# Altium PCB ECEN4730_SS_2021-11-10.PcbDoc
Units mil, origin at the board's own origin, x right, y up, seen from the top; angles counter-clockwise.
Board outline 2500 x 2100 mil, 4 copper layers (Top Layer, Int1 (GND), Int2 (GND), Bottom Layer), stack 53.912 mil thick; 37 components, 21 nets, 130 pads, 32 vias.
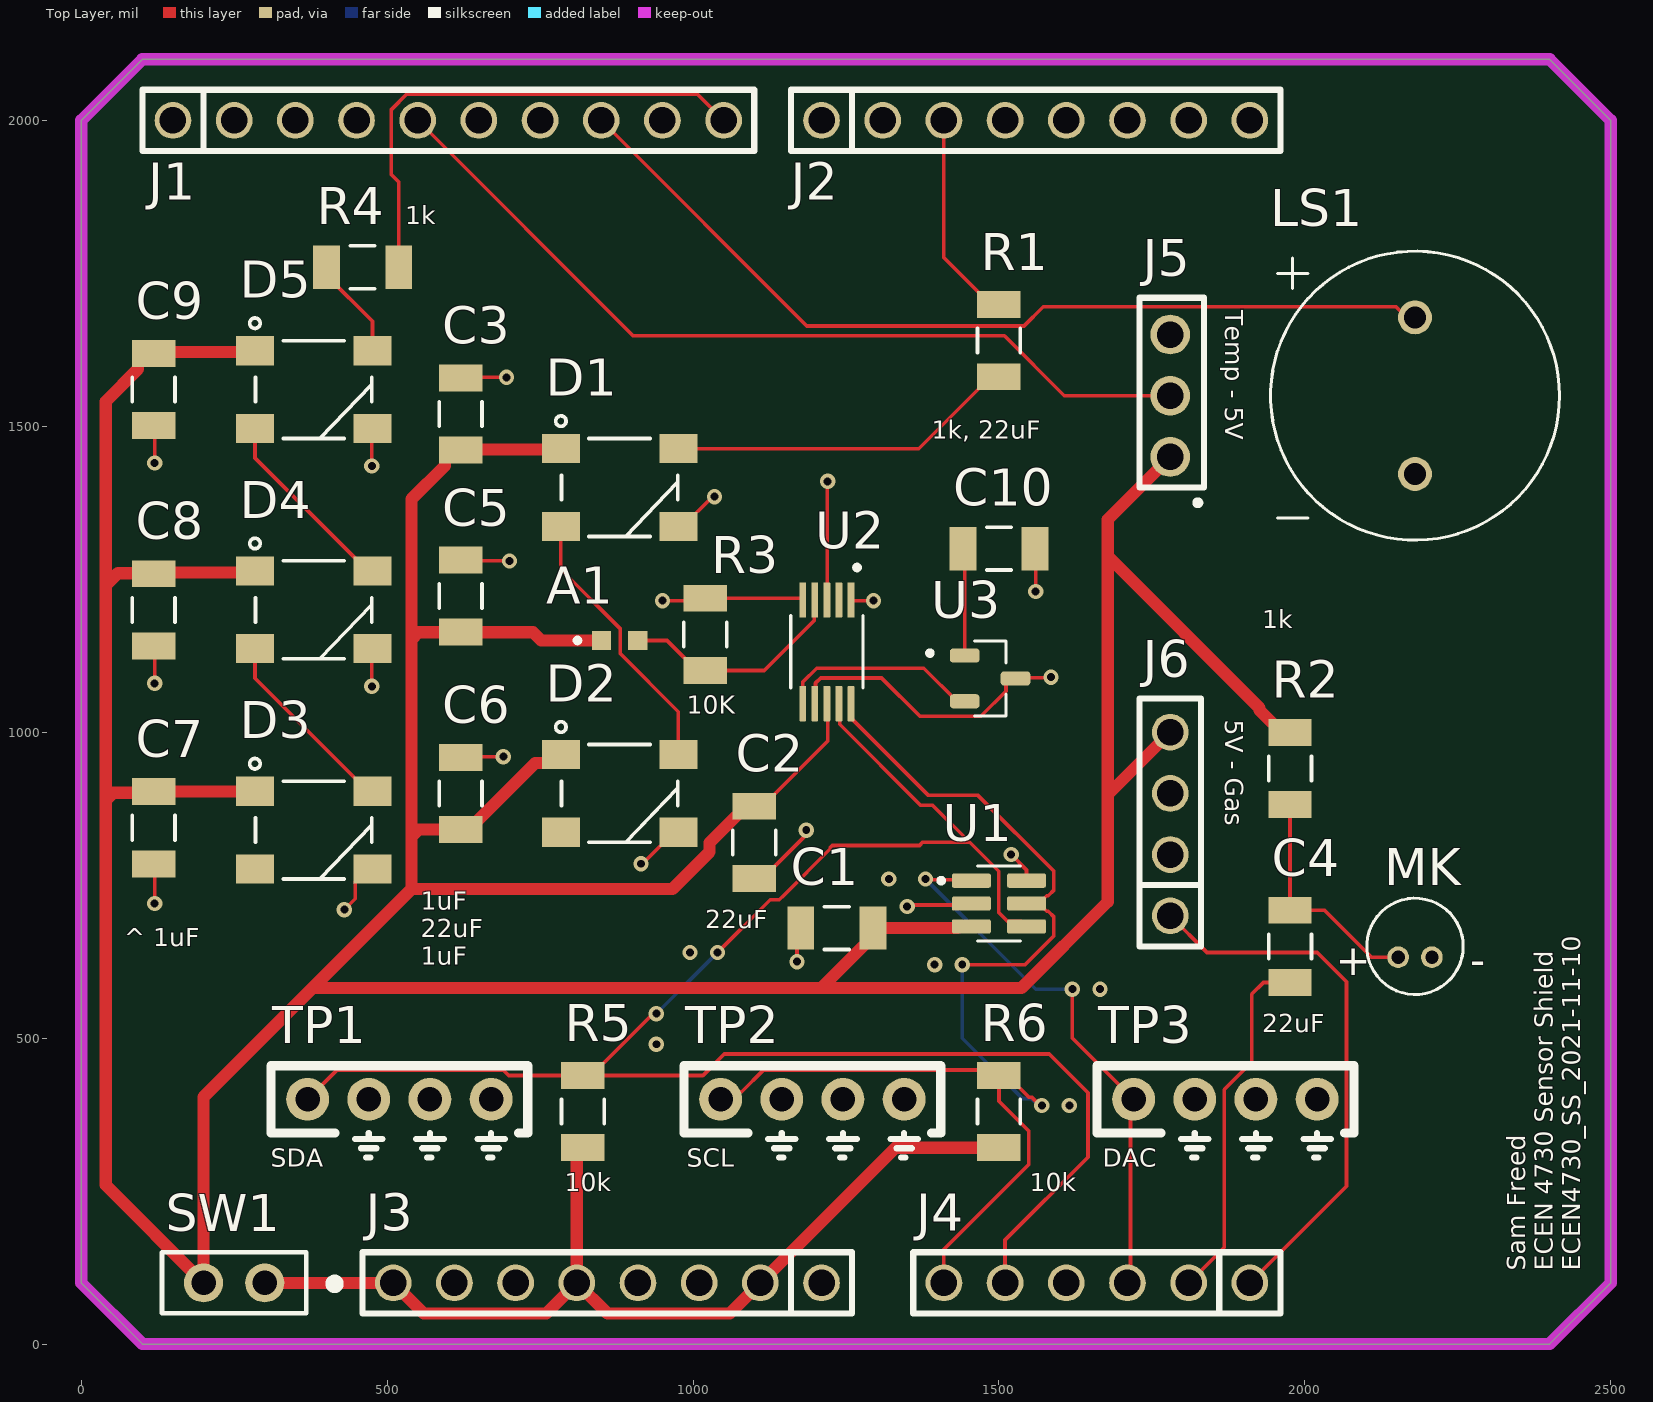
[diagram p0: Top Layer view]
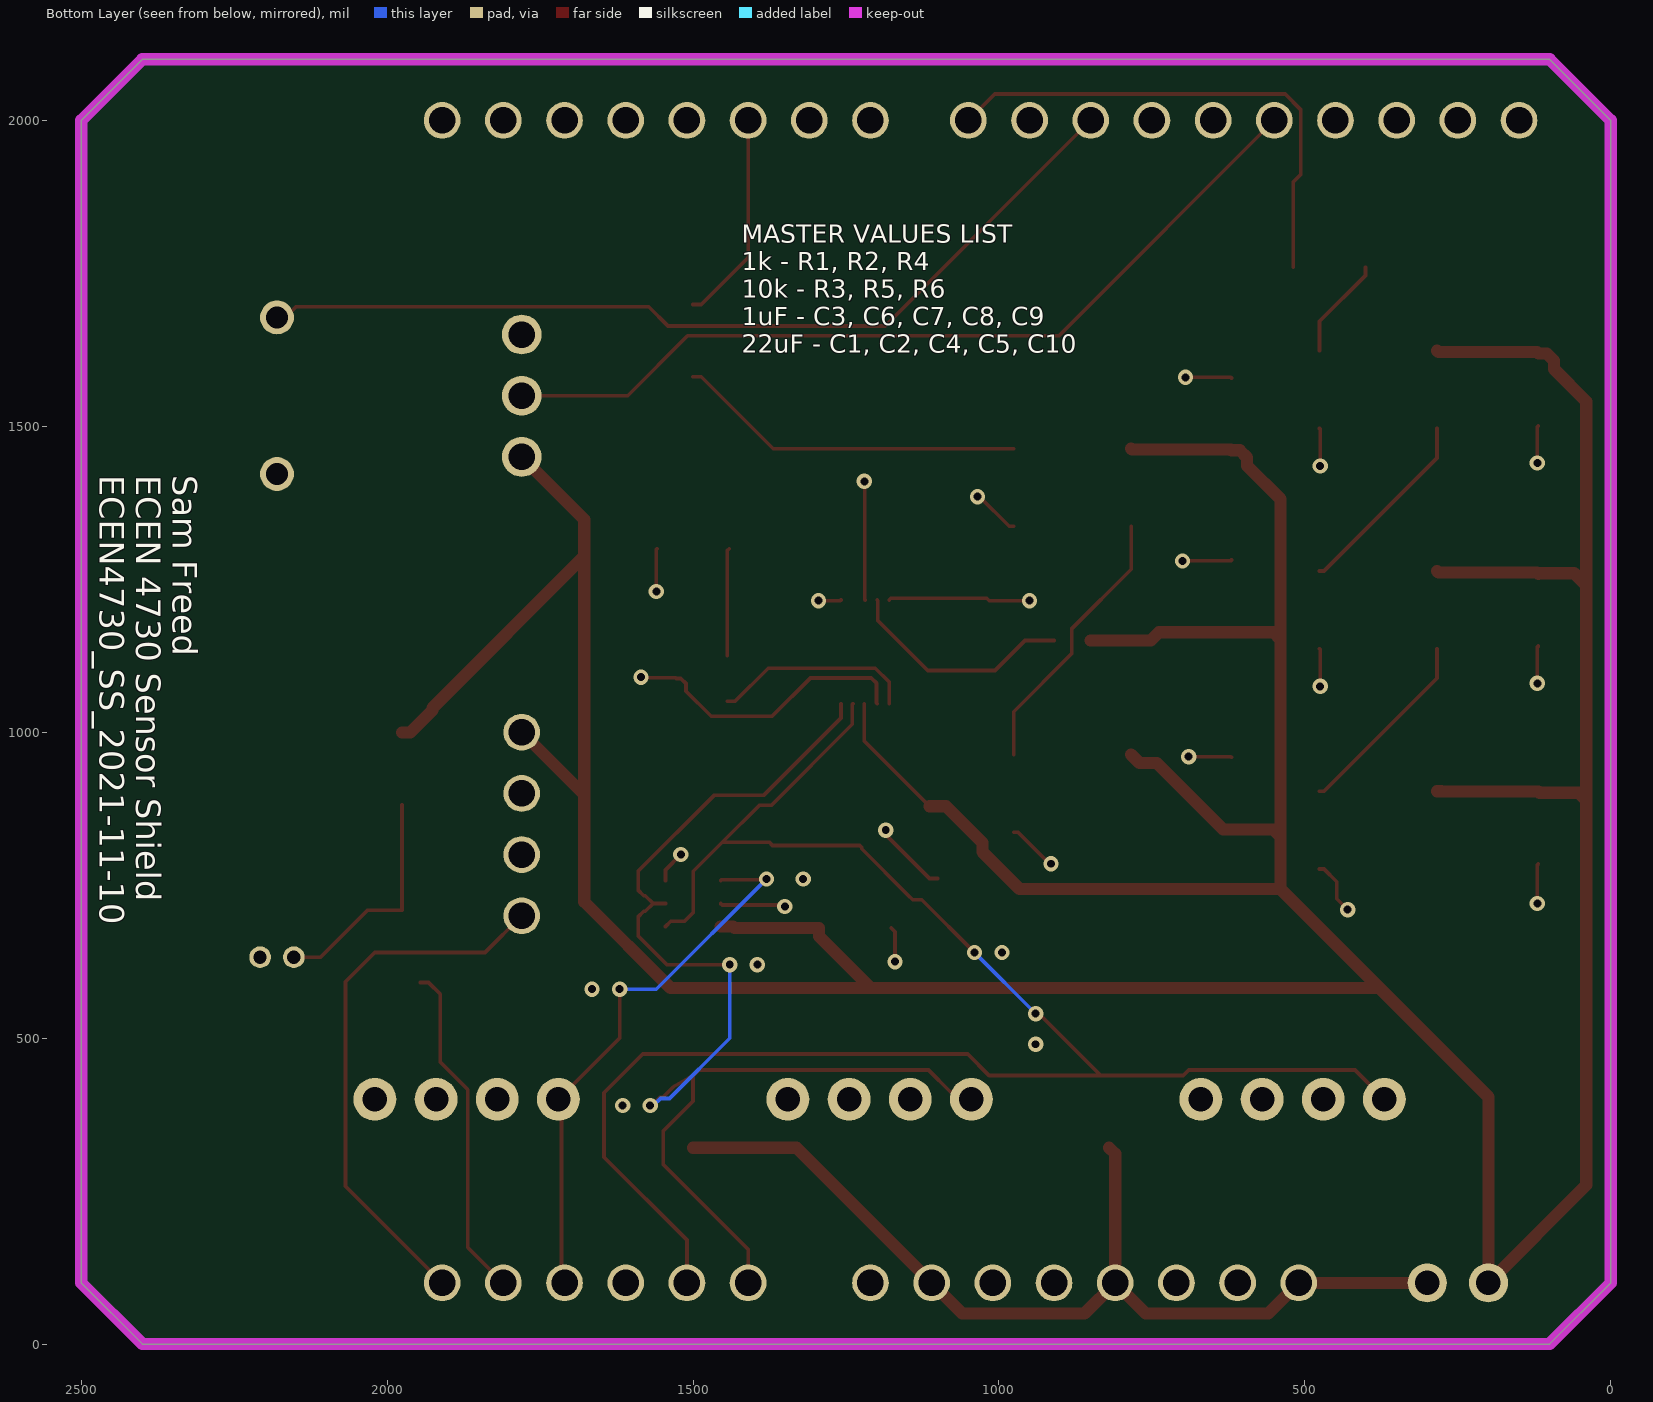
[diagram p1: Bottom Layer view, seen from below]
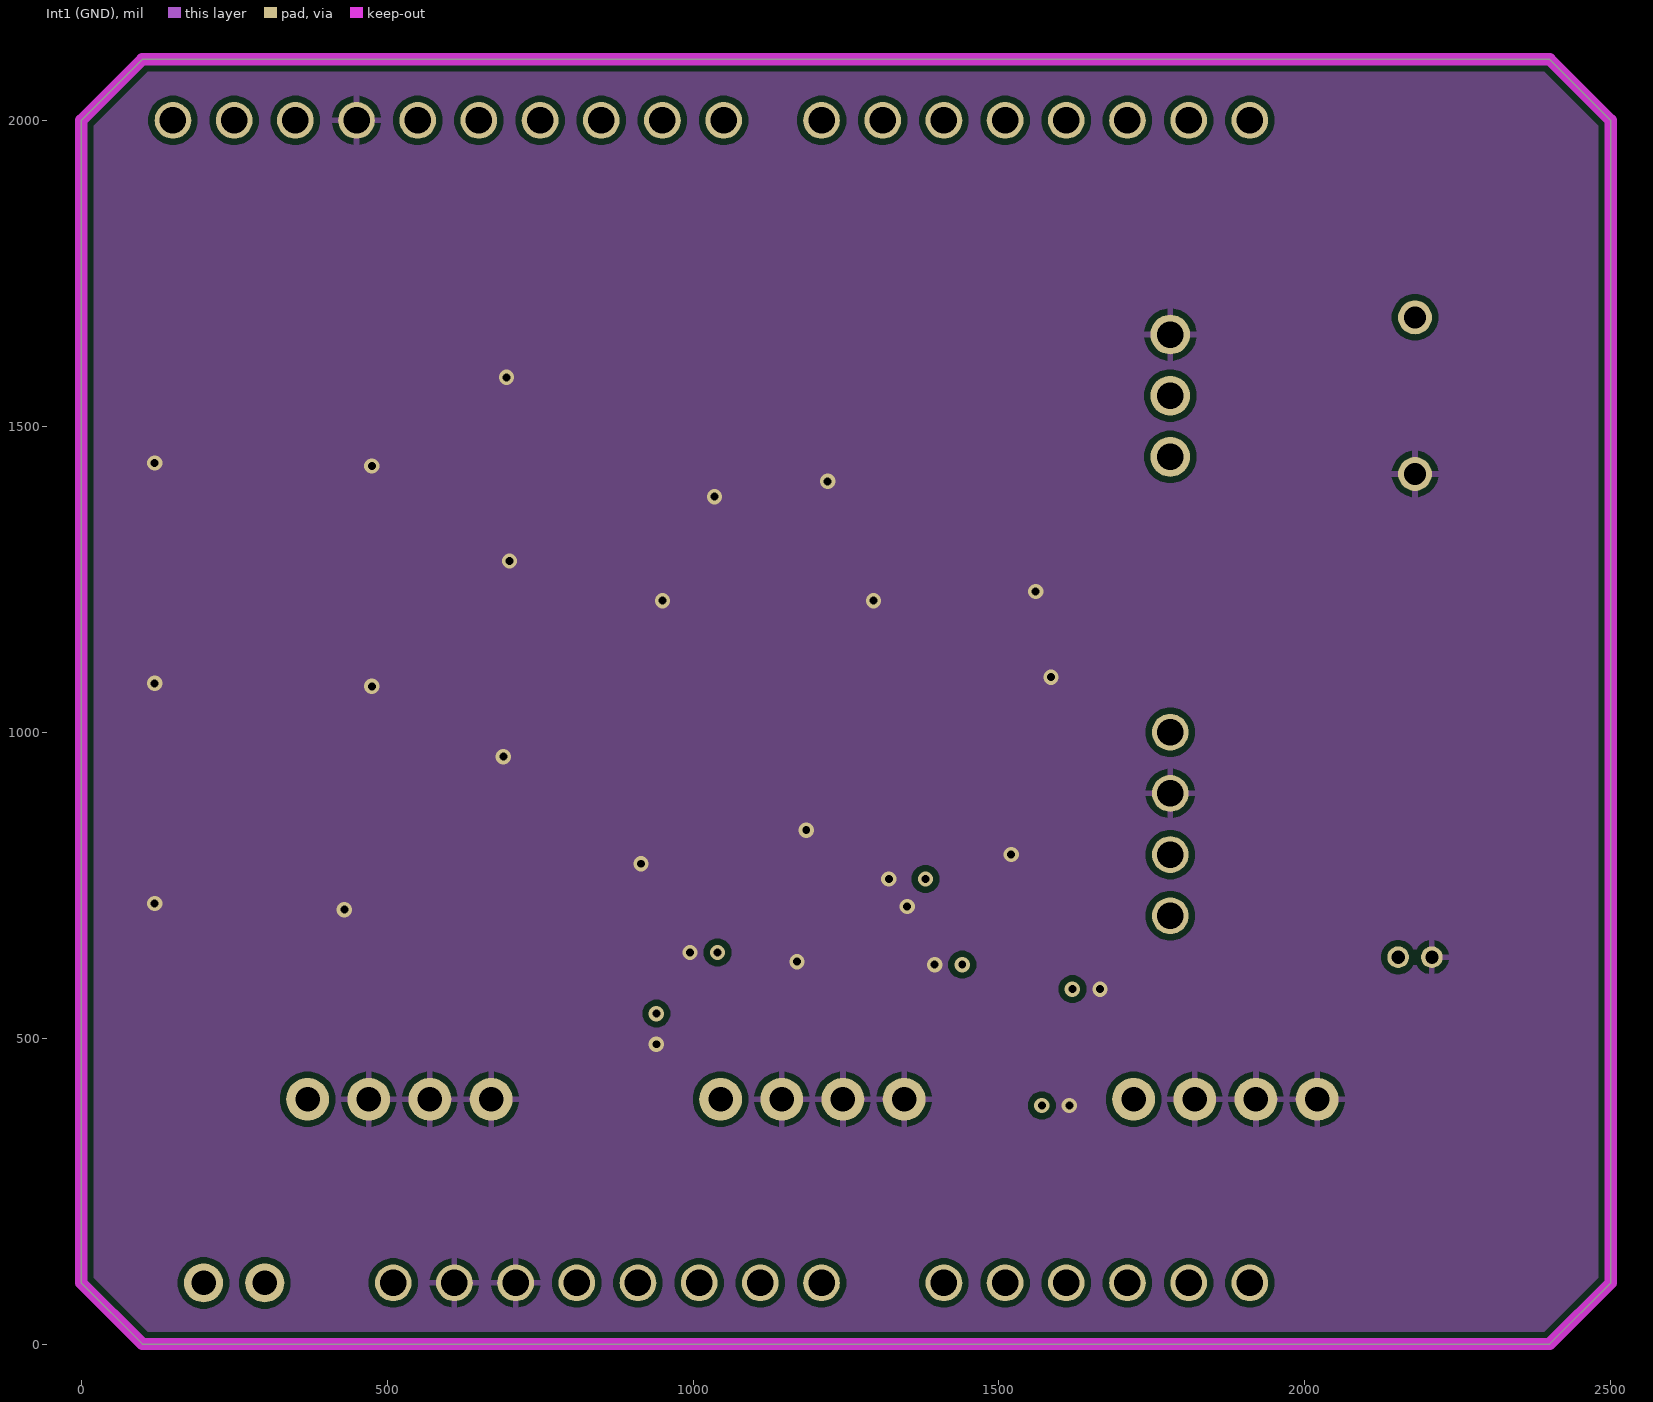
[diagram p2: Int1 (GND)]
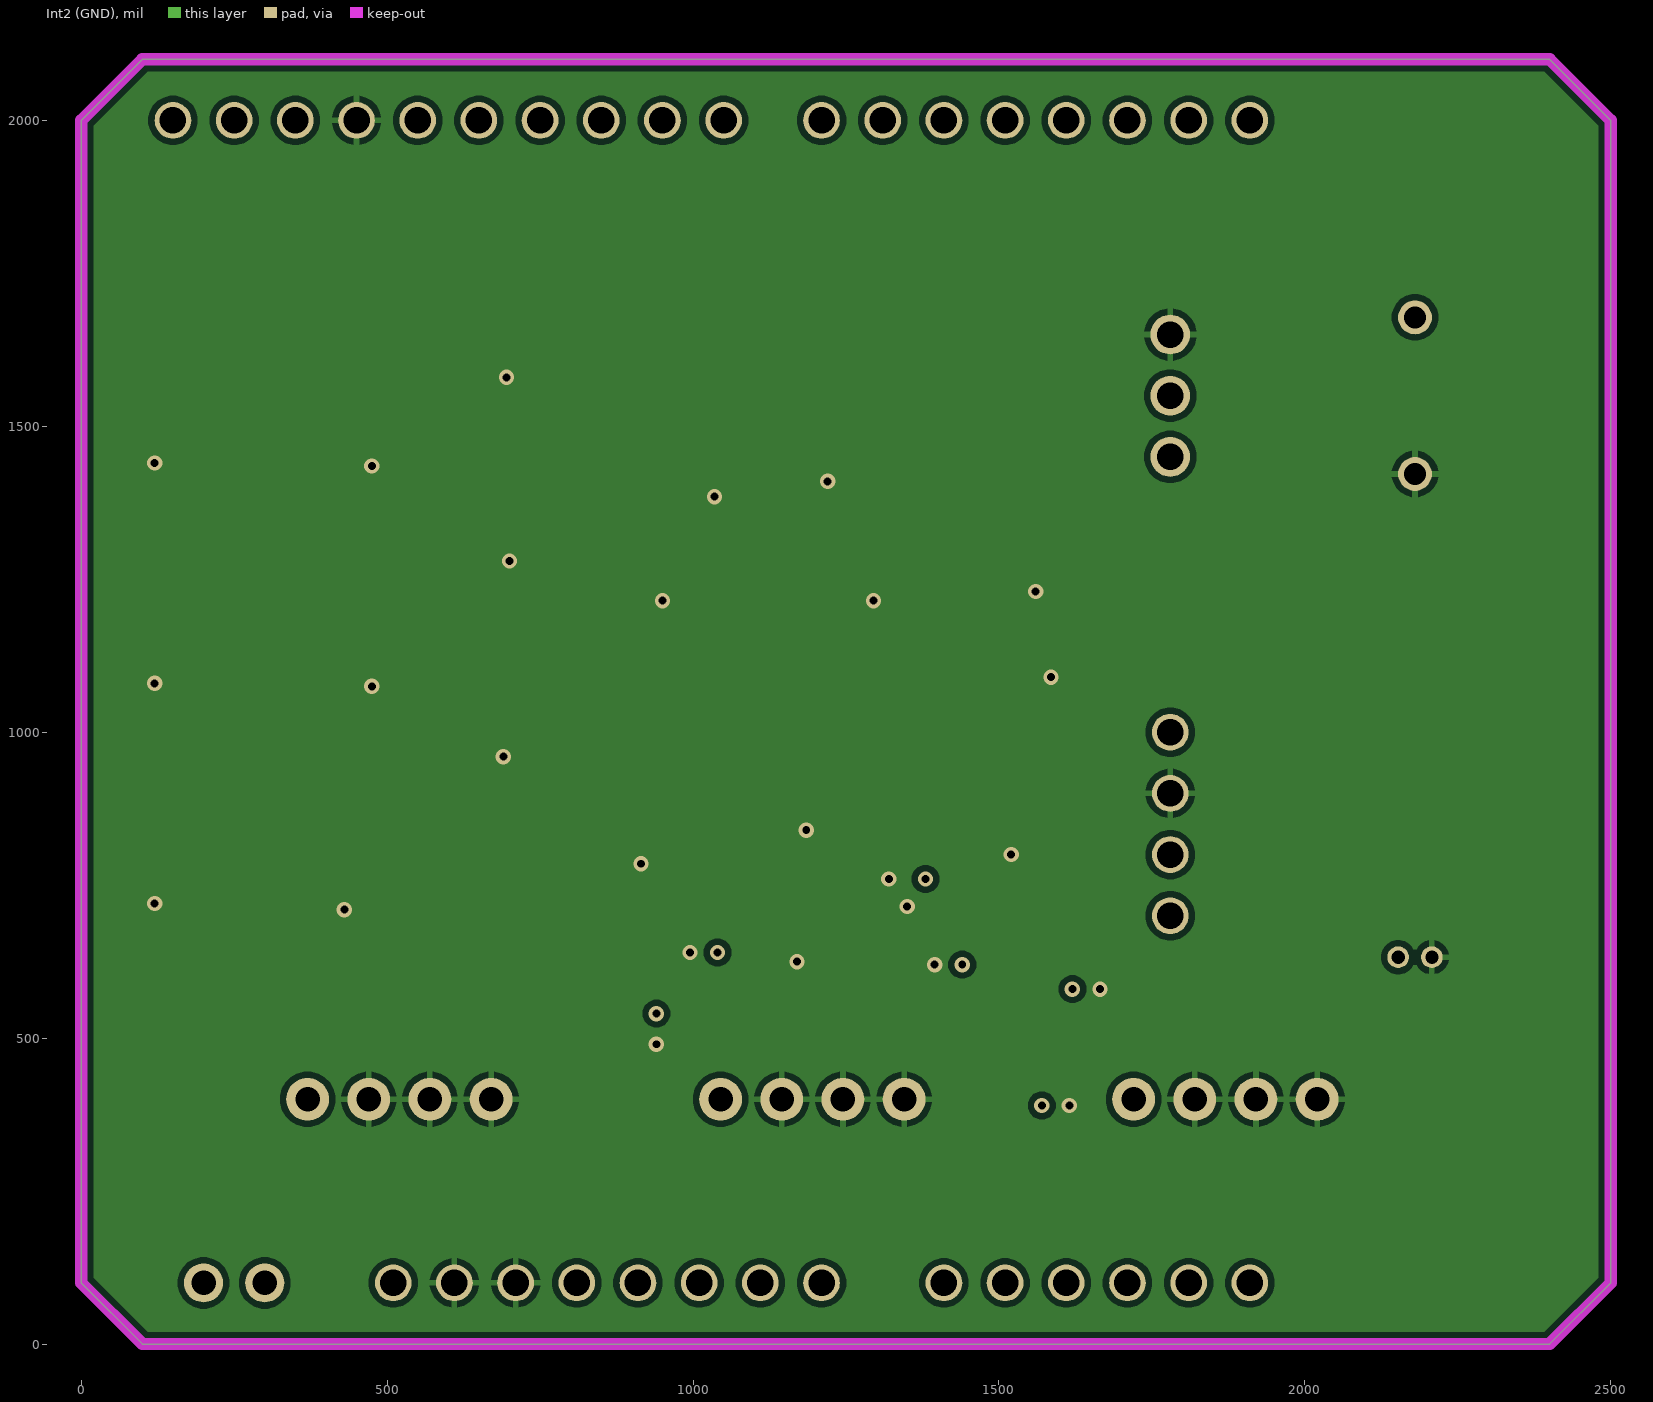
[diagram p3: Int2 (GND)]
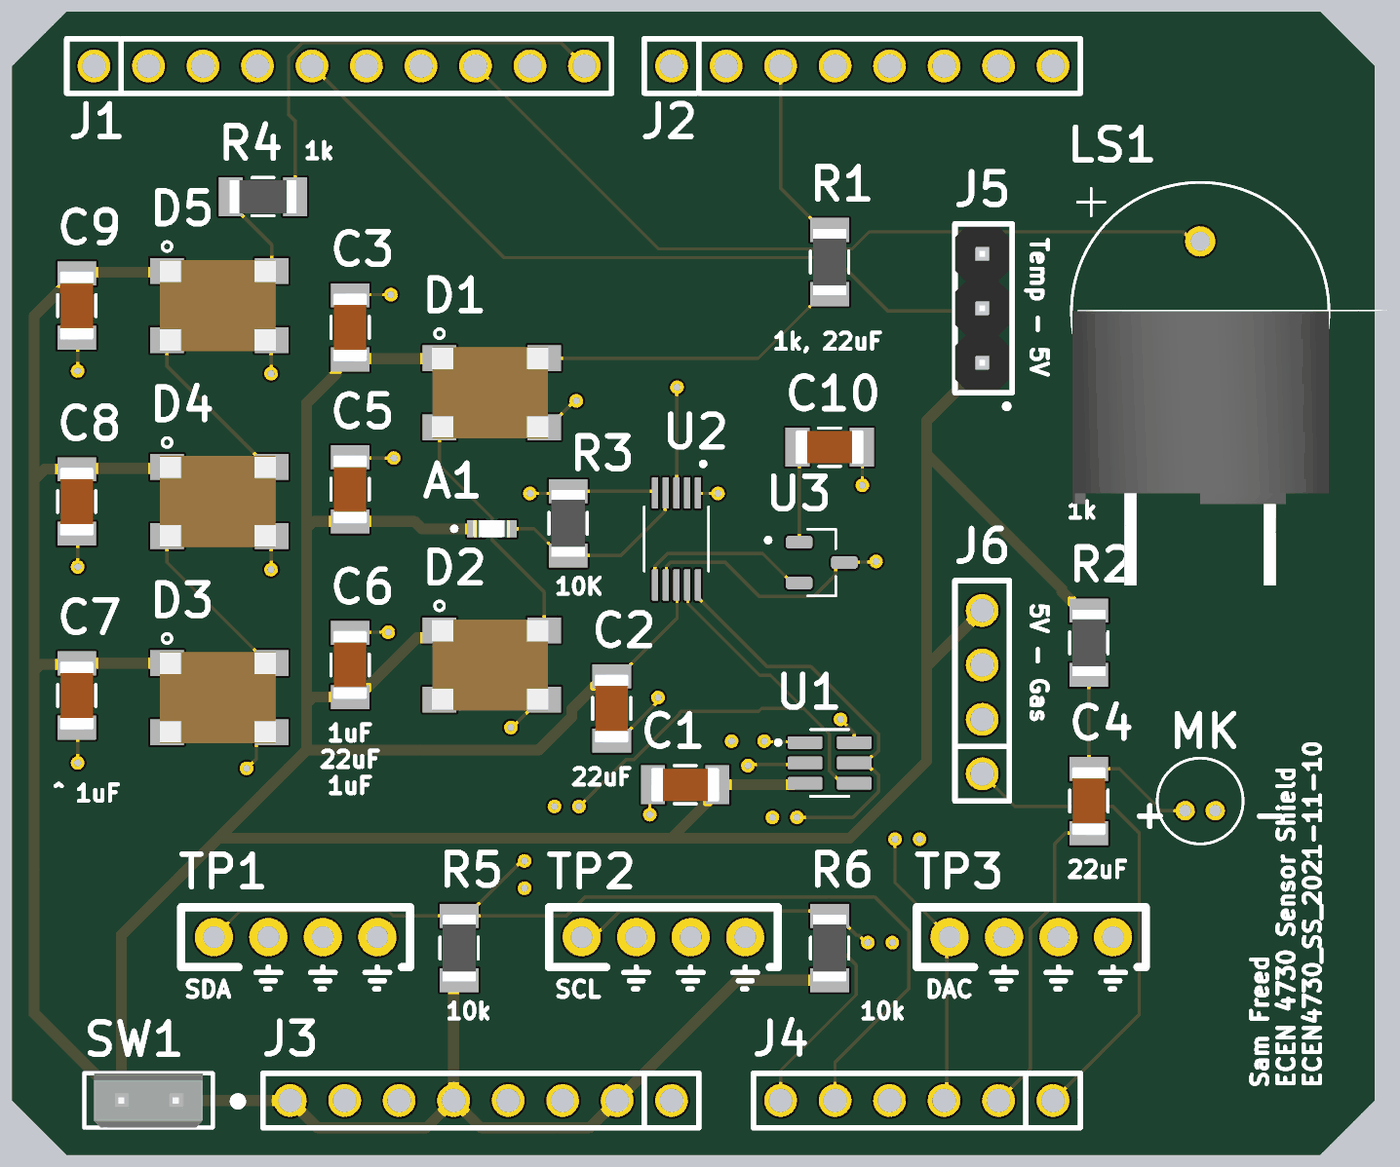
[diagram p4: 3D render of the assembled board from above, using the file's embedded part models]

## Layer stack, top to bottom
Top Solder: solder mask 1, SM-001, Dk 4
Top Layer: signal copper 1.378
Dielectric 1: prepreg 5.1, PP-017, Dk 4.3
Dielectric 2: prepreg 5.1, PP-017, Dk 4.3
Int1 (GND): signal copper 1.378
Dielectric 3: core 28, Core-039, Dk 4.8
Int2 (GND): signal copper 1.378
Dielectric 4: prepreg 5.1, PP-017, Dk 4.3
Dielectric 5: prepreg 5.1, PP-017, Dk 4.3
Bottom Layer: signal copper 1.378
Bottom Solder: solder mask 1, SM-001, Dk 4

## Board outline
0,100 100,0 2400,0 2500,100 2500,2000 2400,2100 100,2100 0,2000

## Design rules (kind name [scope] priority, off if disabled: settings)
BoardOutlineClearance [All] p1: gap=10 ignorepadtopadclearanceinfootprint=FALSE except(0: Arc-SplitContinuation Track-SplitContinuation SMDPad-SplitContinuation THPad-SplitContinuation Via-SplitContinuation Fill-SplitContinuation Poly-SplitContinuation Region-SplitContinuation Text-SplitContinuation)
Clearance [All] p1: gap=10 ignorepadtopadclearanceinfootprint=FALSE except(0: Arc-Hole Track-Hole SMDPad-Hole THPad-Hole Via-Hole Fill-Hole Poly-Hole Region-Hole Text-Hole)
PlaneClearance [All] p1: clearance=10
PlaneConnect [All] p1: planeconnectstyle=Direct reliefexpansion=20 reliefentries=4 reliefconductorwidth=10 reliefairgap=10
PolygonConnect [All] p1: thpad.connectstyle=Relief thpad.reliefconductorwidth=10 thpad.reliefentries=4 thpad.polygonreliefangle="90 Angle" thpad.airgapwidth=10 smdpad.connectstyle=Direct smdpad.reliefconductorwidth=10 smdpad.reliefentries=4 smdpad.polygonreliefangle="90 Angle" smdpad.airgapwidth=10 via.connectstyle=Direct via.reliefconductorwidth=10 via.reliefentries=4 via.polygonreliefangle="90 Angle" via.airgapwidth=10
RoutingVias [All] p1: holewidth=13 width=25 viastyle="Through Hole" minholewidth=13 minwidth=25 maxholewidth=60 maxwidth=80
SolderMaskExpansion [All] p1: expansion=4 istentingtop=FALSE
UnRoutedNet [All] p1: checkbadconnections=TRUE
Width "Schematic Width Constraint_1" [InNet('5V_SW')] p1: maxlimit=100 minlimit=6 preferedwidth=20
Width "Schematic Width Constraint" [InNet('+5')] p2: maxlimit=100 minlimit=10 preferedwidth=20
Width [All] p3: maxlimit=100 minlimit=6 preferedwidth=10 toplayer_prefwidth=6 midlayer1_minwidth=10 midlayer2_minwidth=10 bottomlayer_prefwidth=6 minimp=50.000000 maximp=50.000000 favimp=50.000000
27 further rules are at their usual default settings.

## Components (designator, comment, footprint, x,y, rotation, side; value= is the part's Value field where it differs from the comment)
A1 "ALS-PT19-315C/L177/TR8" XDCR_ALS-PT19-315C/L177/TR8 880,1150 r0 top
C1 "22uF" 1206_Passive_Capacitor 1235,680 r0 top
C2 "22uF" 1206_Passive_Capacitor 1100,820 r90 top
C3 "1uF" 1206_Passive_Capacitor 620,1520 r90 top
C4 "22uF" 1206_Passive_Capacitor 1975.7,650 r90 top
C5 "22uF" 1206_Passive_Capacitor 620,1222.46 r270 top
C6 "1uF" 1206_Passive_Capacitor 620,900 r90 top
C7 "1uF" 1206_Passive_Capacitor 118.37,843.82 r270 top
C8 "1uF" 1206_Passive_Capacitor 118.37,1200 r270 top
C9 "1uF" 1206_Passive_Capacitor 118.37,1560 r270 top
C10 "22uF" 1206_Passive_Capacitor 1500,1300 r180 top
D1 "IN-PI55QATPRPGPBPW" SERIAL_LED 880,1400 r0 top
D2 "IN-PI55QATPRPGPBPW" SERIAL_LED 880,900 r0 top
D3 "IN-PI55QATPRPGPBPW" SERIAL_LED 380,840 r0 top
D4 "IN-PI55QATPRPGPBPW" SERIAL_LED 380,1200 r0 top
D5 "IN-PI55QATPRPGPBPW" SERIAL_LED 380,1560 r0 top
J1 "PPTC101LFBN-RC" 10_PIN_100MIL 150,2000 r0 top value=Male
J2 "PPTC081LFBN-RC" 8_PIN_100MIL 1210,2000 r0 top value=Male
J3 "PPTC081LFBN-RC" 8_PIN_100MIL 1210,100 r180 top value=Male
J4 "PPTC061LFBN-RC" 6_PIN_100MIL 1910,100 r180 top value=Male
J5 "J_3_PIN_HEADER" 3_PIN_100mil 1780,1450 r90 top
J6 "J_4_PIN_HEADER" 4_PIN_100MIL 1780,700 r90 top
LS1 "AT-1224-TWT-5V-2-R" XDCR_AT-1224-TWT-5V-2-R 2180,1550 r0 top
MK "CMEJ-0415-42-P" MIC_CMEJ-0415-42-P 2180,650 r0 top
R1 "1k" 1206_Passive_Resitor 1500,1640 r270 top value="1K Ohm"
R2 "1k" 1206_Passive_Resitor 1975.7,940.56 r270 top value="1K Ohm"
R3 "10k" 1206_Passive_Resitor 1020,1160 r270 top value=10KOhm
R4 "1k" 1206_Passive_Resitor 460,1760 r180 top value="1K Ohm"
R5 "10k" 1206_Passive_Resitor 820,380 r90 top value=10KOhm
R6 "10k" 1206_Passive_Resitor 1500,380 r90 top value=10KOhm
SW1 "SW_2Pin_100mil_Switch" 2Pin-Header-Conn 300,100 r180 top
TP1 "10x Probe TP" TP10x_Probe 520,400 r0 top
TP2 "10x Probe TP" TP10x_Probe 1195,400 r0 top
TP3 "10x Probe TP" TP10x_Probe 1870,400 r0 top
U1 "MCP4725A0T-E/CH" SOT95P270X145-6N 1500,720 r0 top
U2 "ADS1115IDGSR" SOP50P490X110-10N 1218.79,1131.43 r270 top
U3 "DRV5053RAQDBZT" SOT95P237X112-3N 1485.55,1087.94 r0 top

## Footprints (in the part's own frame and the unit in brackets; to place one, negate y for a bottom-side part, rotate by r counter-clockwise, add the part's x,y. Pads: shape width x height; smd on the part's side, far side on the other; paste and mask are expansions set on the pad)
2Pin-Header-Conn [mm]
  round 1.62 hole 1.02: 1(0,0) 2(2.54,0)
  silkscreen extent -3.03,-1.27 4.26,1.26, body extent -1.27,-1.27 3.81,1.27, height 8.13
3_PIN_100mil [mm]
  round 1.65 hole 1.1: 1(0,0) 2(2.54,0) 3(5.08,0)
  silkscreen extent -2,-1.4 6.6,1.27, body extent -1.14,-1.27 6.48,1.27, height 8.38
4_PIN_100MIL [mil]
  round 60 hole 43.31: 1(0,0) 2(100,0) 3(200,0) 4(300,0)
  silkscreen extent -50,-50 355,50
6_PIN_100MIL [mil]
  round 60 hole 43.31: 1(0,0) 2(100,0) 3(200,0) 4(300,0) 5(400,0) 6(500,0)
  silkscreen extent -50,-50 550,50
8_PIN_100MIL [mil]
  round 60 hole 43.31: 1(0,0) 2(100,0) 3(200,0) 4(300,0) 5(400,0) 6(500,0) 7(600,0) 8(700,0)
  silkscreen extent -50,-50 750,50
10_PIN_100MIL [mil]
  round 60 hole 43.31: 1(0,0) 2(100,0) 3(200,0) 4(300,0) 5(400,0) 6(500,0) 7(600,0) 8(700,0) 9(800,0) 10(900,0)
  silkscreen extent -50,-50 950,50
1206_Passive_Capacitor [mil]
  rect 44x71 smd: 1(-59,0) 2(59,0)
  silkscreen extent -20,-35 20,35, body extent -63,-31 63,32, height 50
1206_Passive_Resitor [mil]
  rect 44x71 smd: 1(-59,0) 2(59,0)
  silkscreen extent -20,-35 20,35, body extent -61,-31 61,31, height 26
MIC_CMEJ-0415-42-P [mm]
  round 0.9 hole 0.55: N(0.7,-0.45) P(-0.7,-0.45)
  silkscreen extent -2,-2 2,2
SERIAL_LED [mil] "Footprint for serial LED"
  rect 62x47.5 smd: 1(-96,63.5) 2(-96,-63.5) 3(96,-63.5) 4(96,63.5)
  silkscreen extent -105,-80 95,117, body extent -109,-84 103,84, height 63
SOP50P490X110-10N [mm]
  rrect25% 1.47x0.28 smd: 1(-2.15,1) 2(-2.15,0.5) 3(-2.15,0) 4(-2.15,-0.5) 5(-2.15,-1) 6(2.15,-1) 7(2.15,-0.5) 8(2.15,0) 9(2.15,0.5) 10(2.15,1)
  silkscreen extent -3.6,-1.5 1.5,1.5
SOT95P237X112-3N [mm]
  rrect50% 1.24x0.59 smd: 1(-1.055,0.95) 2(-1.055,-0.95) 3(1.055,0)
  silkscreen extent -2.6,-1.56 0.65,1.56
SOT95P270X145-6N [mm]
  rrect25% 1.61x0.59 smd: 1(-1.145,0.95) 2(-1.145,0) 3(-1.145,-0.95) 4(1.145,-0.95) 5(1.145,0) 6(1.145,0.95)
  silkscreen extent -2.5,-1.56 0.9,1.56
TP10x_Probe [mil] "Small Probs footprint"
  round 70 hole 40: 1(-150,0) 2(-50,0) 2(50,0) 2(150,0)
  silkscreen extent -210,-95 210,55
XDCR_ALS-PT19-315C/L177/TR8 [mm]
  rect 0.8x0.8 smd: 1(-0.75,0) 2(0.75,0)
  silkscreen extent -1.85,-0.1 -1.65,0.1, body extent -0.85,-0.4 0.85,0.4, height 0.6
XDCR_AT-1224-TWT-5V-2-R [mm]
  round 1.408 hole 0.9: N(0,-3.25) P(0,3.25)
  silkscreen extent -6,-6 6,6, body extent -6,-12.8 8.75,0.05, height 6

## Part data
A1: "Phototransistors 630nm 2-SMD, No Lead", Package=None, Availability=Good, Check_prices=https://www.snapeda.com/parts/ALS-PT19-315C/L177/TR8/Everlight%20Electronics%20Co%20Ltd/view-part/226235/?ref=eda, MF=Everlight, MP=ALS-PT19-315C/L177/TR8, Price=None, Purchase-URL=https://pricing.snapeda.com/search/part/ALS-PT19-315C/L177/TR8/?ref=eda, SnapEDA_Link=https://www.snapeda.com/parts/ALS-PT19-315C/L177/TR8/Everlight%20Electronics%20Co%20Ltd/view-part/226235/?ref=snap
C1 C2 C4 C5 C10: library part C_22uF_1206, "22µF ±20% 16V Ceramic Capacitor X5R 1206 (3216 Metric)", MFR Part #=CL31A226KPHNNNE, Digikey Link=https://www.digikey.com/product-detail/en/CL31A226MOCLNNC/1276-2728-1-ND/3890814/?itemSeq=304982363, Digikey Part=1276-2728-1-ND, Type=Extended
C3 C6 C7 C8 C9: library part C_1uF_1206, "1µF ±20% 16V Ceramic Capacitor X7R 1206 (3216 Metric)", MFR Part #=CL31B105KBHNNNE, Digikey Link=https://www.digikey.com/product-detail/en/C1206C105M4RACTU/399-8150-1-ND/3471873/?itemSeq=304982366, Digikey Part=399-8150-1-ND, Type=Basic
D1 D2 D3 D4 D5: library part LED_Smart_5050, "Digital Series Cascade LED", DigiKey=https://www.digikey.com/product-detail/en/inolux/IN-PI55QATPRPGPBPW-60/1830-1209-1-ND/9681289
J1: library part JM_10_PIN_MALE, "10 Position Header Connector 0.100\" (2.54mm) Through Hole Tin", LCSC Part#=DNP, Digikey Link=https://www.digikey.com/product-detail/en/PPTC101LFBN-RC/S7008-ND/810149/?itemSeq=304982352, Digikey Part=S7008-ND
J2 J3: library part JM_8_PIN_MALE, "8 Position Header Connector 0.100\" (2.54mm) Through Hole Tin", LCSC Part#=DNP, Digikey Link=https://www.digikey.com/product-detail/en/PPTC081LFBN-RC/S7006-ND/810147/?itemSeq=304982354, Digikey Part=S7006-ND
J4: library part JM_6_PIN_MALE, "6 Position Header Connector 0.100\" (2.54mm) Through Hole Tin", LCSC Part#=DNP, Digikey Link=https://www.digikey.com/product-detail/en/PPTC061LFBN-RC/S7004-ND/810145/?itemSeq=304982353, Digikey Part=S7004-ND
J5: "3 Position Header Connector 0.100\" (2.54mm) Through Hole Tin"
J6: "4 Position Header Connector 0.100\" (2.54mm) Through Hole Tin"
LS1: "AUDIO TRANSDUCER 5 VP-P 87 DB 2400 HZ", Package="PUI Audio,", Availability="In Stock", Check_prices=https://www.snapeda.com/parts/AT-1224-TWT-5V-2-R/PUI%20Audio,%20Inc./view-part/453710/?ref=eda, MF="PUI Audio,", MP=AT-1224-TWT-5V-2-R, Price=None, Purchase-URL=https://pricing.snapeda.com/search/part/AT-1224-TWT-5V-2-R/?ref=eda, SnapEDA_Link=https://www.snapeda.com/parts/AT-1224-TWT-5V-2-R/PUI%20Audio,%20Inc./view-part/453710/?ref=snap
MK: "4.0 Ð¼Ð¼, Ð²ÑÐµÐ½Ð°Ð¿Ñ€Ð°Ð²Ð»ÐµÐ½Ð½Ñ‹Ð¹, Ð¼Ð¾Ð½Ñ‚Ð°Ð¶ Ð½Ð° Ð¿ÐµÑ‡Ð°Ñ‚Ð½Ð¾Ð¹ Ð¿Ð»Ð°Ñ‚Ðµ, 2.0 Ð’ Ð¿Ð¾ÑÑ‚Ð¾ÑÐ½Ð½Ð¾Ð³Ð¾ Ñ‚Ð¾ÐºÐ°, Ð­Ð»ÐµÐºÑ€ÐµÑ‚-ÐºÐ¾Ð½Ð´ÐµÐ½ÑÐ°Ñ‚Ð¾Ñ€Ð½Ñ‹Ð¹ Ð¼Ð¸ÐºÑ€Ð¾Ñ„Ð¾Ð½", Package="CUI Inc.", CUI_purchase_URL=https://www.cuidevices.com/product/audio/microphones/electret-condenser-microphones/cmej-0415-42-p?utm_source=snapeda.com&utm_medium=referral&utm_campaign=snapedaBOM, Digi-Key_Part_Number=102-6542-ND, Digi-Key_Purchase_URL=https://www.digikey.com/product-detail/en/cui-devices/CMEJ-0415-42-P/102-6542-ND/10253451?utm_source=snapeda&utm_medium=aggregator&utm_campaign=symbol, MF="CUI Devices", MP=CMEJ-0415-42-P, SnapEDA_Link=https://www.snapeda.com/parts/CMEJ-0415-42-P/CUI%20Devices/view-part/3625885/?ref=snap
R1 R2 R4: library part R_1K_1206, "1 kOhms ±1% 0.5W, 1/2W Chip Resistor 1206 (3216 Metric) Anti-Sulfur, Moisture Resistant Thin Film", MFR Part #=1206W4F1001T5, Digikey Link=https://www.digikey.com/product-detail/en/RNCP1206FTD1K00/RNCP1206FTD1K00CT-ND/2240675/?itemSeq=304982373, Digikey Part=RNCP1206FTD1K00CT-ND
R3 R5 R6: library part R_10KOhm_1206, "10 kOhms ±5% 0.25W, 1/4W Chip Resistor 1206 (3216 Metric) Automotive AEC-Q200 Thick Film", Digikey Link=https://www.digikey.com/product-detail/en/RMCF1206JT300R/RMCF1206JT300RCT-ND/1942776/?itemSeq=304982374, Digikey Part=RMCF1206JT300RCT-ND
SW1: "2Pin Header", LCSC Part#=C124375, Type=Extended
TP1 TP2 TP3: library part TP_10x_Probe, "Test Point 300 mil centers"
U1: "12 Bit Digital to Analog Converter 1 SOT-23-6", Package="SOT-23-6 Microchip", Availability=Unavailable, MF=Microchip, MP=MCP4725A0T-E/CH, Price=None, SnapEDA_Link=https://www.snapeda.com/parts/MCP4725A0T-E/CH/Microchip/view-part/109888/?ref=snap
U2: "16-Bit 860SPS 4-Ch Delta-Sigma ADC With PGA, Oscillator, Vref, Comparator, and I2C 10-VSSOP -40 to 125", Package="VSSOP-10 Texas Instruments", Availability=Good, BuyPart=https://www.snapeda.com/parts/ADS1115IDGSR/Texas%20Instruments/view-part/45903/?ref=eda, DigiKey-Purchase-URL=https://snapeda.com/shop?store=DigiKey&id=45903, MF="Texas Instruments", Mouser-Purchase-URL=https://snapeda.com/shop?store=Mouser&id=45903, MP=ADS1115IDGSR, Price=None, SnapEDA_Link=https://www.snapeda.com/parts/ADS1115IDGSR/Texas%20Instruments/view-part/45903/?ref=snap, Texas_Instruments-Purchase-URL=https://snapeda.com/shop?store=Texas+Instruments&id=45903
U3: "SENSOR LINEAR ANALOG SOT23-3", Package=None, Availability=Unavailable, MP=DRV5053RAQDBZT, Price=None

## Via types
v1: diameter 25, hole 13, Top Layer to Bottom Layer, 31 vias
v2: diameter 25/25/25/25 (per signal layer), hole 13, Top Layer to Bottom Layer, 1 vias

## Nets (pads, with @x,y where several pads share a name; then routed paths per layer and width w, separated by ;. In a path a pad name is that pad's centre, name@x,y a point inside that pad or via, vN(x,y) a via of type N, cw(c..) or ccw(c..) an arc to the next point about the centre after c; other vN are vias at no path point)
5V_SW: A1.1 C1.2 C2.2 C3.1 C5.2 C6.1 C7.1 C8.1 C9.1 D1.1 D2.1 D3.1 D4.1 D5.1 J5.1 J6.4 R2.1 SW1.2 U1.3 U2.8 | length 8463.1
  Top Layer w6: C2.2@1113.5,879 1220,985.5 U2.8@1220,1046.78
  Top Layer w20: D3.1 276.75,903.5 276.41,903.16 118.71,903.16 C7.1 116.71,901.16 52.87,901.16 40,888.28 ; D4.1 281.75,1261.25 120.62,1261.25 C8.1 117.37,1260 60,1260 40,1240 ; D5.1 281.75,1621.25 120.62,1621.25 C9.1 104.87,1619 92.87,1607 92.87,1593.5 40,1540.63 40,1240 ; D2.1 770.25,949.75 742.25,949.75 633.5,841 C6.1 551.72,841 540,829.28 ; D1.1 782.75,1462.25 621.25,1462.25 C3.1 606.5,1461 594.5,1449 594.5,1435.5 540,1381 540,1151.74 ; A1.1 751.84,1150 738.38,1163.46 C5.2 551.72,1163.46 540,1151.74 ; C2.2@1113.5,879 C2.2 1086.5,879 1027,819.5 1027,804.47 966.43,743.89 540,743.89 ; U1.3 1434.84,682.6 1432.24,680 C1.2 1294,666.5 1210,582.5 1210,581.95 ; J6.4 1677.85,897.85 ; J5.1 1677.85,1347.85 1677.85,1287.85 ; R2.1 1962.2,999.56 1925.96,1035.8 1925.96,1039.74 1677.85,1287.85 ; 40,888.28 40,1240 ; 40,888.28 40,260 SW1.2 200,403.89 378.05,581.95 ; 378.05,581.95 1210,581.95 ; 378.05,581.95 540,743.89 ; 540,743.89 540,829.28 ; 540,829.28 540,1151.74 ; 1210,581.95 1536.94,581.95 1677.85,722.85 1677.85,897.85 ; 1677.85,897.85 1677.85,1287.85
+5: J3.2 J3.5 J3.8 R5.1 R6.1 SW1.1 | length 1599.5
  Top Layer w20: SW1.1 J3.8 560,50 760,50 J3.5 ; R5.1 810,311 J3.5 ; R6.1 1331,321 J3.2 1060,50 860,50 J3.5
A0: A1.2 R3.2 U2.4 | length 376.5
  Top Layer w6: A1.2 957.5,1150 1006.5,1101 R3.2 1116.38,1101 1197.93,1182.56 1197.93,1214.9 U2.4
A2: U2.6 U3.2 | length 331.7
  Top Layer w6: U2.6 1179.42,1082.06 1202.08,1104.72 1377.04,1104.72 1431.22,1050.54 U3.2
A4: J4.5 R5.2 TP1.1 U1.4 U2.9 | length 3000.4
  Top Layer w6: TP1.1 418,448 689.88,448 698.88,439 R5.2 R5.2@833.5,439 ; v1(940,540) 934.5,540 R5.2@833.5,439 ; v1(1040,640) 1126,726 1140.88,726 1148.5,733.62 1224.41,809.53 1224.41,811.49 1227.93,815 1370,815 1375,820 1452.31,820 ; U2.9 1239.65,1045.61 1239.65,1012.88 1371.76,880.77 1391.54,880.77 1452.31,820 ; J4.5 1510,170 1645.5,305.5 1645.5,410.56 1582.06,474 1051.12,474 1016.12,439 R5.2@833.5,439 ; U1.4 1536.46,691.21 1513.88,691.21 1499.61,705.47 1499.61,772.7 1452.31,820
  Bottom Layer w6: v1(940,540) v1(1040,640)
A5: J4.6 R6.2 TP2.1 U1.5 U2.10 | length 2055.2
  Top Layer w6: TP2.1 1057.25,412.25 1079.46,412.25 1115.22,448 1491,448 R6.2 ; U2.10 1258.16,1023.35 1384.75,896.77 1465.7,896.77 1589.77,772.7 1589.77,742.1 1580.46,732.79 1577.94,732.79 U1.5@1565.16,720 ; J4.6 1410,155.12 1548.5,293.62 1548.5,348.38 1500,396.88 R6.2 ; v1(1440,620) 1542.47,620 1589.77,667.3 1589.77,697.9 1580.46,707.21 1577.94,707.21 U1.5@1565.16,720 ; U1.5 U1.5@1565.16,720 ; v1(1570,390) 1566.87,390 1553.23,403.64 1548.86,403.64 1532.5,420 R6.2
  Bottom Layer w6: v1(1440,620) 1440,500 1538.5,401.5 1553.36,401.5 1564.86,390 v1(1570,390)
D2: J2.3 R1.1 | length 346.2
  Top Layer w6: J2.3 1410,1775.5 1486.5,1699 R1.1
D8: J1.10 R4.1 | length 834
  Top Layer w6: R4.1 519,1899.16 507,1911.16 507,2017.81 532.19,2043 1007,2043 J1.10
D10: J1.8 LS1.P | length 1489.5
  Top Layer w6: J1.8 1186,1664 1540.88,1664 1572.36,1695.48 2149.1,1695.48 2166.62,1677.95 LS1.P
D13: J1.5 J5.2 | length 1416.4
  Top Layer w6: J1.5 902,1648 1508.88,1648 1606.88,1550 J5.2
DAC: J4.3 TP3.1 U1.1 | length 916.1
  Top Layer w6: v1(1380,760) 1381.3,758.7 1453.62,758.7 U1.1 ; v1(1620,580) 1620,500 TP3.1 1715,395 1715,105 J4.3
  Bottom Layer w6: v1(1380,760) 1560,580 v1(1620,580)
GAS: J4.1 J6.1 | length 890.2
  Top Layer w6: J6.1 1840,640 2020,640 2068,592 2068,258 J4.1
GND: C1.1 C2.1 C3.2 C5.1 C6.2 C7.2 C8.2 C9.2 C10.1 D1.3 D2.3 D3.3 D4.3 D5.3 J1.4 J3.6 J3.7 J5.3 J6.3 LS1.N MK.N R3.1 TP1.2 TP2.2 TP3.2 U1.2 U1.6 U2.1 U2.3 U2.5 U2.7 U3.3 | length 2146.7
  Top Layer w6: C7.2 120,783.19 v1(120,720) ; C8.2 120,1139.37 v1(120,1080) ; C9.2 120,1499.37 v1(120,1440) ; v1(430,710) 448,728 448,755.75 468.75,776.5 D3.3 ; v1(475,1075) 475,1135.5 D4.3 ; v1(475,1435) 475,1495.5 D5.3 ; C6.2 621,960 v1(690,960) ; C5.1 621.46,1280 v1(700,1280) ; C3.2 621,1580 v1(695,1580) ; v1(915,785) 917.25,785 968.75,836.5 D2.3 ; v1(950,1215) 1016,1215 R3.1 1176.91,1219 1179.42,1216.49 U2.5 ; D1.3 983.25,1336.5 1031.75,1385 v1(1035,1385) ; C2.1 1113.5,761 1181.36,828.86 1181.36,836.36 v1(1185,840) ; v1(1170,625) 1170,674 C1.1 ; U2.7 1200.28,1047.95 1200.28,1080.29 1208.7,1088.72 1308.16,1088.72 1370.95,1025.92 1470.41,1025.92 1511.5,1067.01 1511.5,1079.54 1519.9,1087.94 U3.3 1528.13,1088.97 1583.97,1088.97 v1(1585,1090) ; U2.3 1219.4,1216.68 1219.4,1409.4 v1(1220,1410) ; U2.1 1259.23,1215 v1(1295,1215) ; v1(1350,715) 1352.5,717.5 1452.42,717.5 U1.2 ; v1(1520,800) 1545.08,774.92 U1.6 ; C10.1 1560,1299 v1(1560,1230)
  other v1: 1615,390 940,490 1395,620 995,640 1320,760
  other v2: 1665,580
MIC: C4.1 J4.2 | length 555.1
  Top Layer w6: J4.2 1868,158 1868,415.88 1913.2,461.08 1913.2,572 1932.2,591 C4.1@1945.7,591
NetC4_2: C4.2 MK.P R2.2 | length 381.1
  Top Layer w6: R2.2 C4.2 2031.98,709 2108.7,632.28 MK.P
NetC10_2: C10.2 U3.1 | length 175.9
  Top Layer w6: C10.2 1444.01,1296.99 U3.1
NetD1_2: D1.2 D2.4 | length 452.5
  Top Layer w6: D1.2 784,1266.35 880.78,1169.57 880.78,1128.87 976,1033.65 D2.4
NetD1_4: D1.4 R1.2 | length 572.7
  Top Layer w6: D1.4 1369,1463.5 1486.5,1581 R1.2
NetD3_4: D3.4 D4.2 | length 316.8
  Top Layer w6: D4.2 284,1088.25 468.75,903.5 D3.4
NetD4_4: D4.4 D5.2 | length 316.8
  Top Layer w6: D5.2 284,1448.25 468.75,1263.5 D4.4
NetD5_4: D5.4 R4.2 | length 167.6
  Top Layer w6: R4.2 401,1746.5 476,1671.5 D5.4
pads on no net: D2.2 D3.2 J1.1 J1.2 J1.3 J1.6 J1.7 J1.9 J2.1 J2.2 J2.4 J2.5 J2.6 J2.7 J2.8 J3.1 J3.3 J3.4 J4.4 J6.2 U2.2

## Polygon pours and split planes (outlines as drawn)
GND on Int1 (GND) "GND_L02_P000" (solid, pour order 0): 2400,0 2500,100 2500,2000 2400,2100 100,2100 0,2000 0,100 100,0
GND on Int2 (GND) "GND_L03_P001" (solid, pour order 1): 100,2100 0,2000 0,100 100,0 2400,0 2500,100 2500,2000 2400,2100

## Keep-outs
Keep-Out Layer:
  the board outline again, w20

## Silkscreen, mask and mechanical layers (free items; w line width, h text height)
Top Overlay:
  text "1k" at 530,1830 h30
  text "Temp - 5V" at 1870,1690 h30 r270
  text "1k, 22uF" at 1390,1480 h30
  text "1k" at 1930,1170 h30
  text "10K" at 990,1030 h30
  text "5V - Gas" at 1870,1020 h30 r270
  text "22uF" at 1020,680 h30
  text "^ 1uF" at 70,650 h30
  text "1uF / 22uF / 1uF" at 555.02,620 h30
  text "22uF" at 1930,510 h30
  text "SDA" at 310,290 h30
  text "SCL" at 990,290 h30
  text "DAC" at 1670,290 h30
  text "10k" at 790,250 h30
  text "10k" at 1550,250 h30
  text "Sam Freed / ECEN 4730 Sensor Shield / ECEN4730_SS_2021-11-10" at 2450,120 h30 r90
Bottom Overlay:
  text "MASTER VALUES LIST / 1k - R1, R2, R4 / 10k - R3, R5, R6 / 1uF - C3, C6, C7, C8, C9 / 22uF - C1, C2, C4, C5, C10" at 1420,1620 h30
  text "Sam Freed / ECEN 4730 Sensor Shield / ECEN4730_SS_2021-11-10" at 2470,1420 h40 r90

## Text inside footprints (layer, text, board x,y; h text height)
MK: Top Overlay "-" at 2270.55,602.76 h50; Top Overlay "+" at 2050.08,602.76 h50; Mechanical 13 "-" at 2270.55,602.76 h50; Mechanical 13 "+" at 2050.08,602.76 h50